# Altium PCB commutatorPlate.PcbDoc
Units mil, origin at the board's own origin, x right, y up, seen from the top; angles counter-clockwise.
Board outline 1150 x 1180 mil, 2 copper layers (Top Layer, Bottom Layer); 1 components, 0 nets, 8 pads, 0 vias.
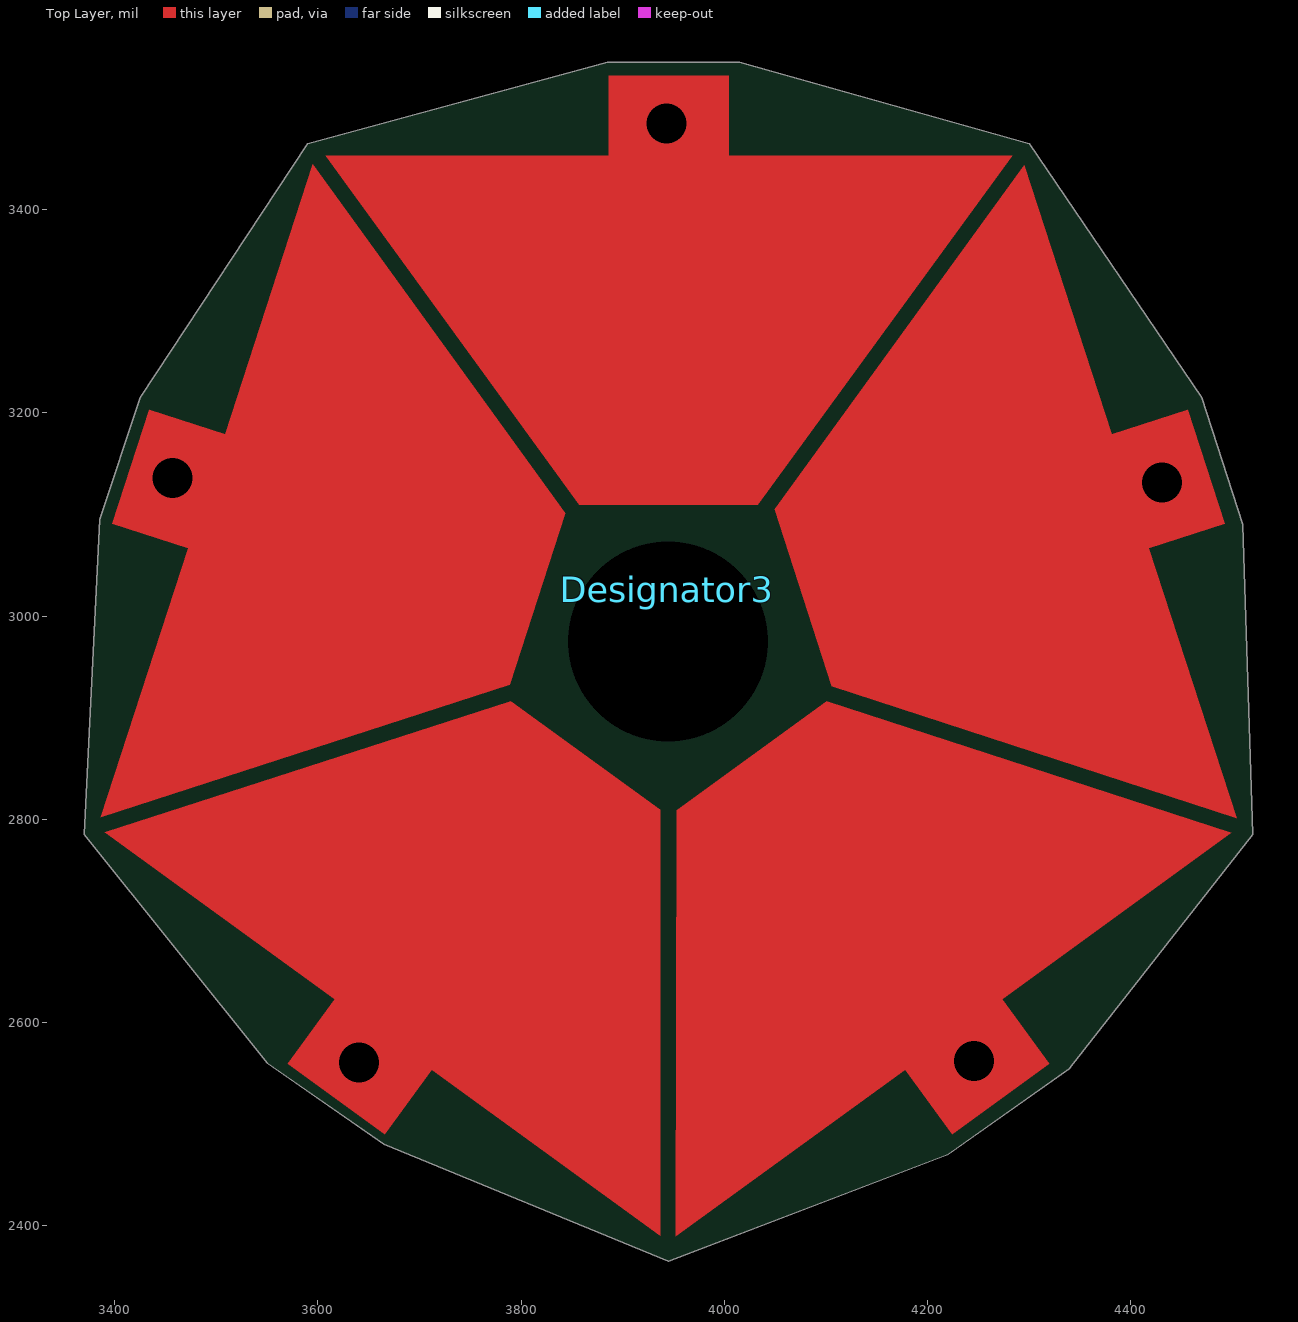
[diagram p0: Top Layer view]
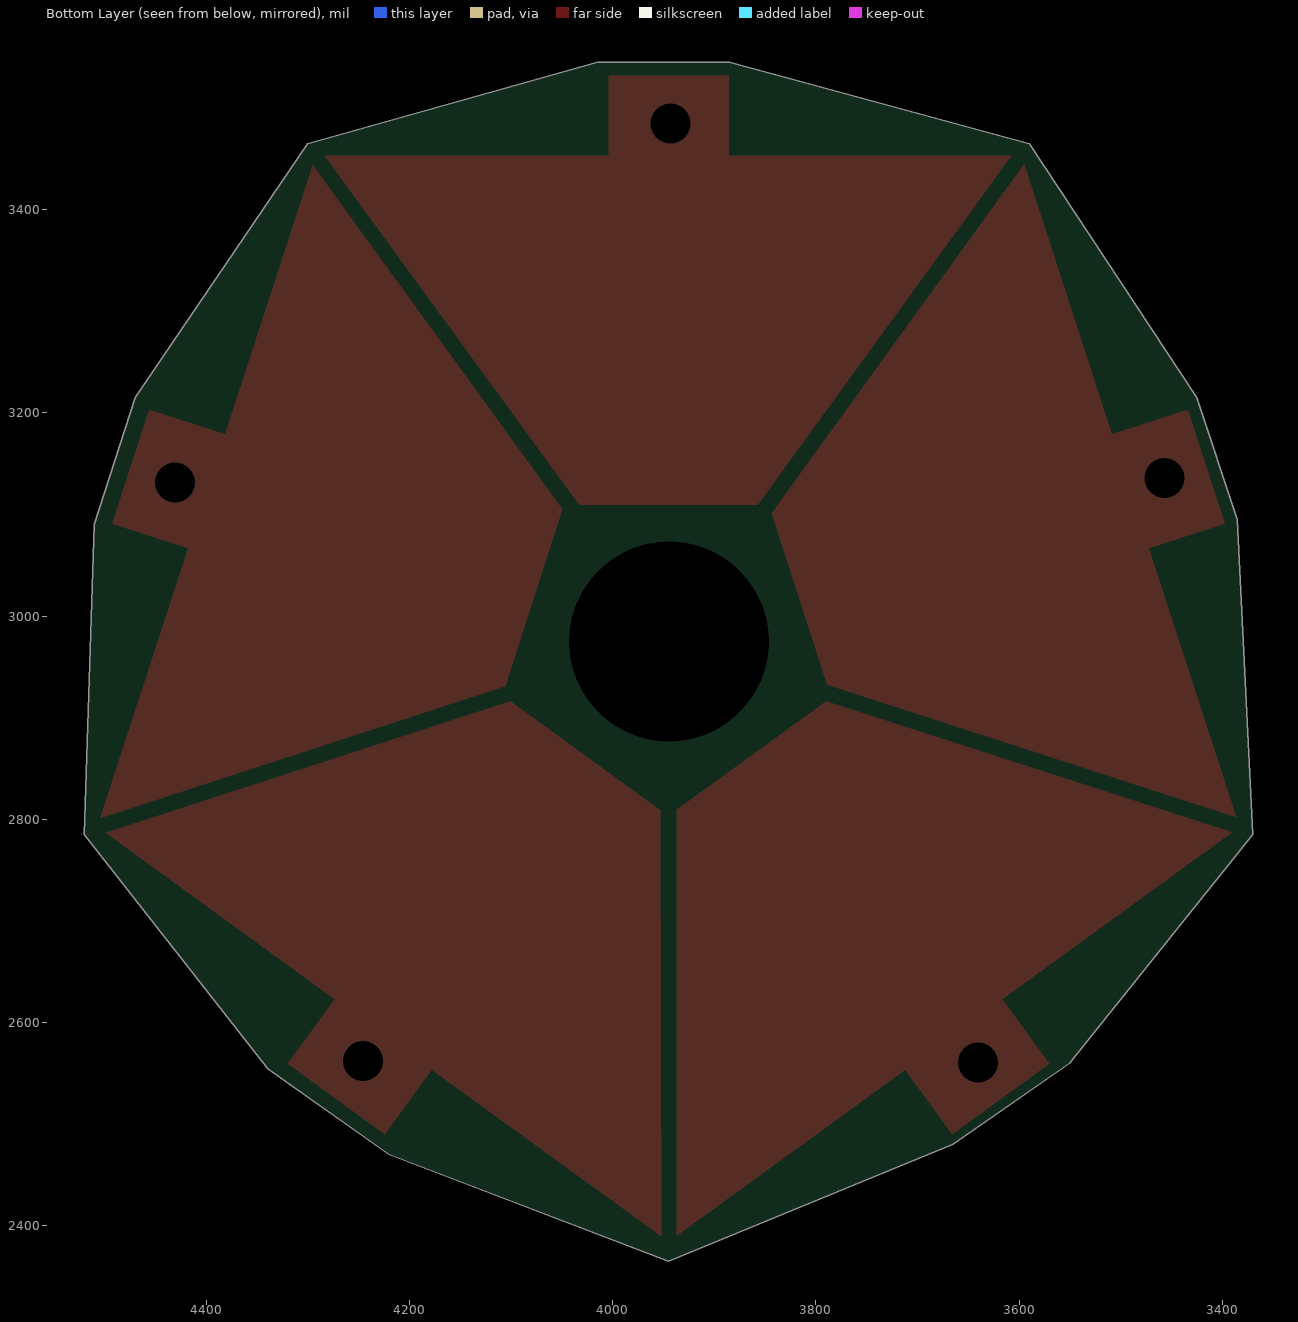
[diagram p1: Bottom Layer view, seen from below]

## Layer stack, top to bottom
Top Solder: solder mask 0.4, Solder Resist, Dk 3.5
Top Layer: signal copper 1.4
Dielectric 1: dielectric 12.6, FR-4, Dk 4.8
Bottom Layer: signal copper 1.4
Bottom Solder: solder mask 0.4, Solder Resist, Dk 3.5

## Board outline
3370,2785 3550,2560 3665,2480 3945,2365 4220,2470 4340,2555 4520,2785 4510,3090 4470,3215 4300,3465 4015,3545 3885,3545 3590,3465 3425,3215 3385,3095

## Design rules (kind name [scope] priority, off if disabled: settings)
Clearance [All] p1: gap=10
PolygonConnect [All] p1: connectstyle=Relief reliefconductorwidth=10 reliefentries=4 polygonreliefangle="90 Angle" airgapwidth=10
RoutingVias [All] p1: holewidth=28 width=50 viastyle="Through Hole" minholewidth=28 minwidth=50 maxholewidth=28 maxwidth=50
SolderMaskExpansion [All] p1: expansion=4
UnpouredPolygon [All] p1: allowunpoured=FALSE
Width [All] p1: maxlimit=10 minlimit=10 preferedwidth=10
29 further rules are at their usual default settings.

## Components (designator, comment, footprint, x,y, rotation, side; value= is the part's Value field where it differs from the comment)
Designator3 "Comment" "COMMUTATOR PLATE" 3945,2975 r0 top

## Footprints (in the part's own frame and the unit in brackets; to place one, negate y for a bottom-side part, rotate by r counter-clockwise, add the part's x,y. Pads: shape width x height; smd on the part's side, far side on the other; paste and mask are expansions set on the pad)
"COMMUTATOR PLATE" [mm]
  round 1 on Drill Guide: 1(-0.088,12.953) 3(0.011,13.138)
  round 0 hole 1: 4(-12.401,4.083) 4(-7.735,-10.525) 4(-0.048,12.942) 4(7.637,-10.486) 4(12.34,3.968)
  round 0 hole 5: 4(-0.008,-0.003)
  Top Layer region: -1.5,14.14 -1.5,12.14 -8.57,12.14 -2.233,3.419 2.235,3.419 8.597,12.14 1.5,12.14 1.5,14.14
  Top Layer region: -13.911,2.943 -12.009,2.325 -14.194,-4.399 -3.971,-1.077 -2.579,3.207 -8.889,11.928 -11.082,5.178 -12.984,5.796
  Top Layer region: -7.098,-12.321 -5.922,-10.703 -0.202,-14.859 -0.203,-4.211 -3.944,-1.493 -14.091,-4.768 -8.349,-8.94 -9.525,-10.558
  Top Layer region: 9.525,-10.558 8.349,-8.94 14.069,-4.784 3.953,-1.498 0.201,-4.223 0.181,-14.875 5.922,-10.703 7.098,-12.321
  Top Layer region: 12.984,5.796 11.082,5.178 8.898,11.902 2.65,3.303 4.086,-1.116 14.202,-4.425 12.009,2.325 13.911,2.943

## Nets (pads, with @x,y where several pads share a name; then routed paths per layer and width w, separated by ;. In a path a pad name is that pad's centre, name@x,y a point inside that pad or via, vN(x,y) a via of type N, cw(c..) or ccw(c..) an arc to the next point about the centre after c; other vN are vias at no path point)
pads on no net: Designator3.1 Designator3.3 Designator3.4

## Silkscreen, mask and mechanical layers (free items; w line width, h text height)
Mechanical 1:
  lines w10: 3945,3070 ccw(c3945,2973.43) 3876.72,3041.72 ccw(c3941.21,2977.22) 3850,2977.22 ccw(c3951.92,2977.22) 3879.85,2905.15 ccw(c3940.56,2965.86) 3940.56,2880 ccw(c3940.56,2987.28) 4016.42,2911.42 ccw(c3959.5,2968.35) 4040,2968.35 ; 3949.64,3070 cw(c3949.64,2984.64) 4010,3045 cw(c3937.57,2972.57) 4040,2972.57 ; 3370,2785 3385,3095 3425,3215 3590,3465 3885,3545 4015,3545 4300,3465 4470,3215 4510,3090 4520,2785 4340,2555 4220,2470 3945,2365 3665,2480 3550,2560 3370,2785